# Altium PCB bela_cape.PcbDoc
Units mil, origin at the board's own origin, x right, y up, seen from the top; angles counter-clockwise.
Board outline 3030.03 x 2155.03 mil, 16 copper layers (Top, Route2, Route3, Route4, Route5, Route6, Route7, Route8, Route9, Route10, Route11, Route12, Route13, Route14, Route15, Bottom), stack 34.956 mil thick; 32 components, 22 nets, 194 pads, 21 vias.
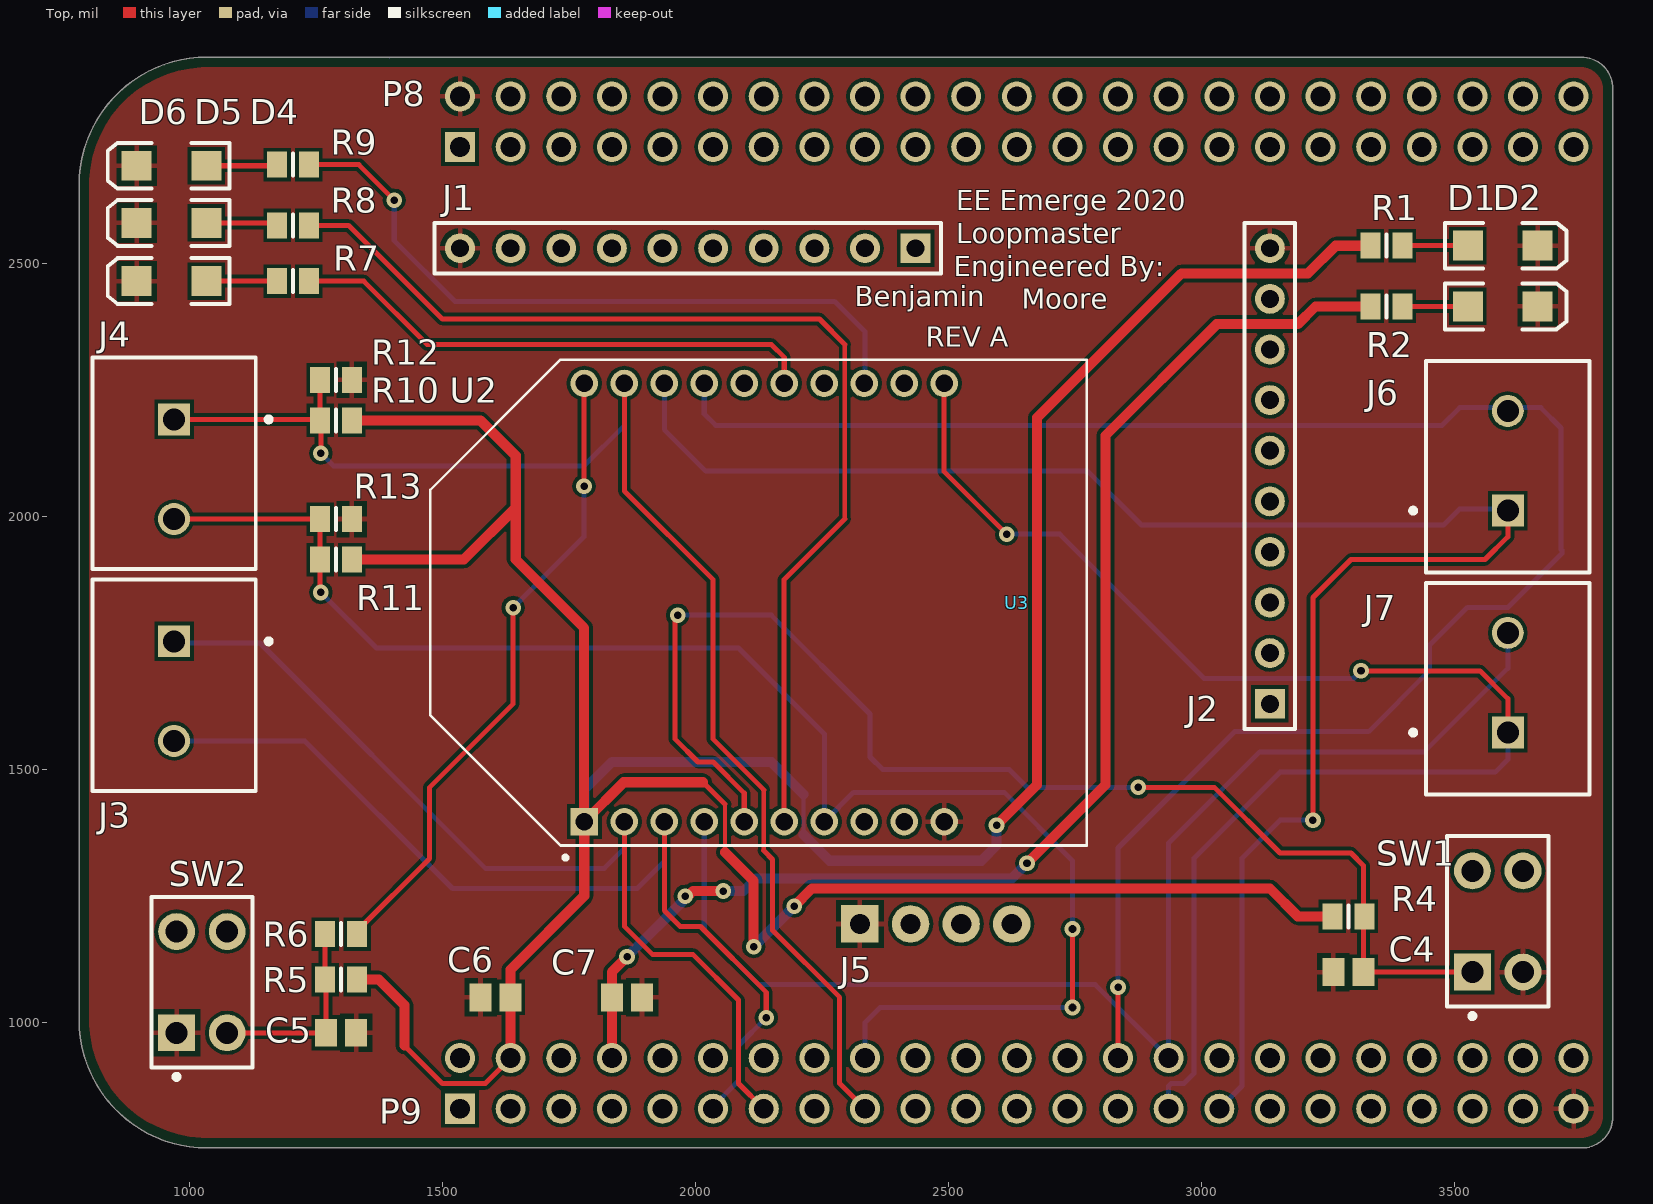
[diagram p0: Top view]
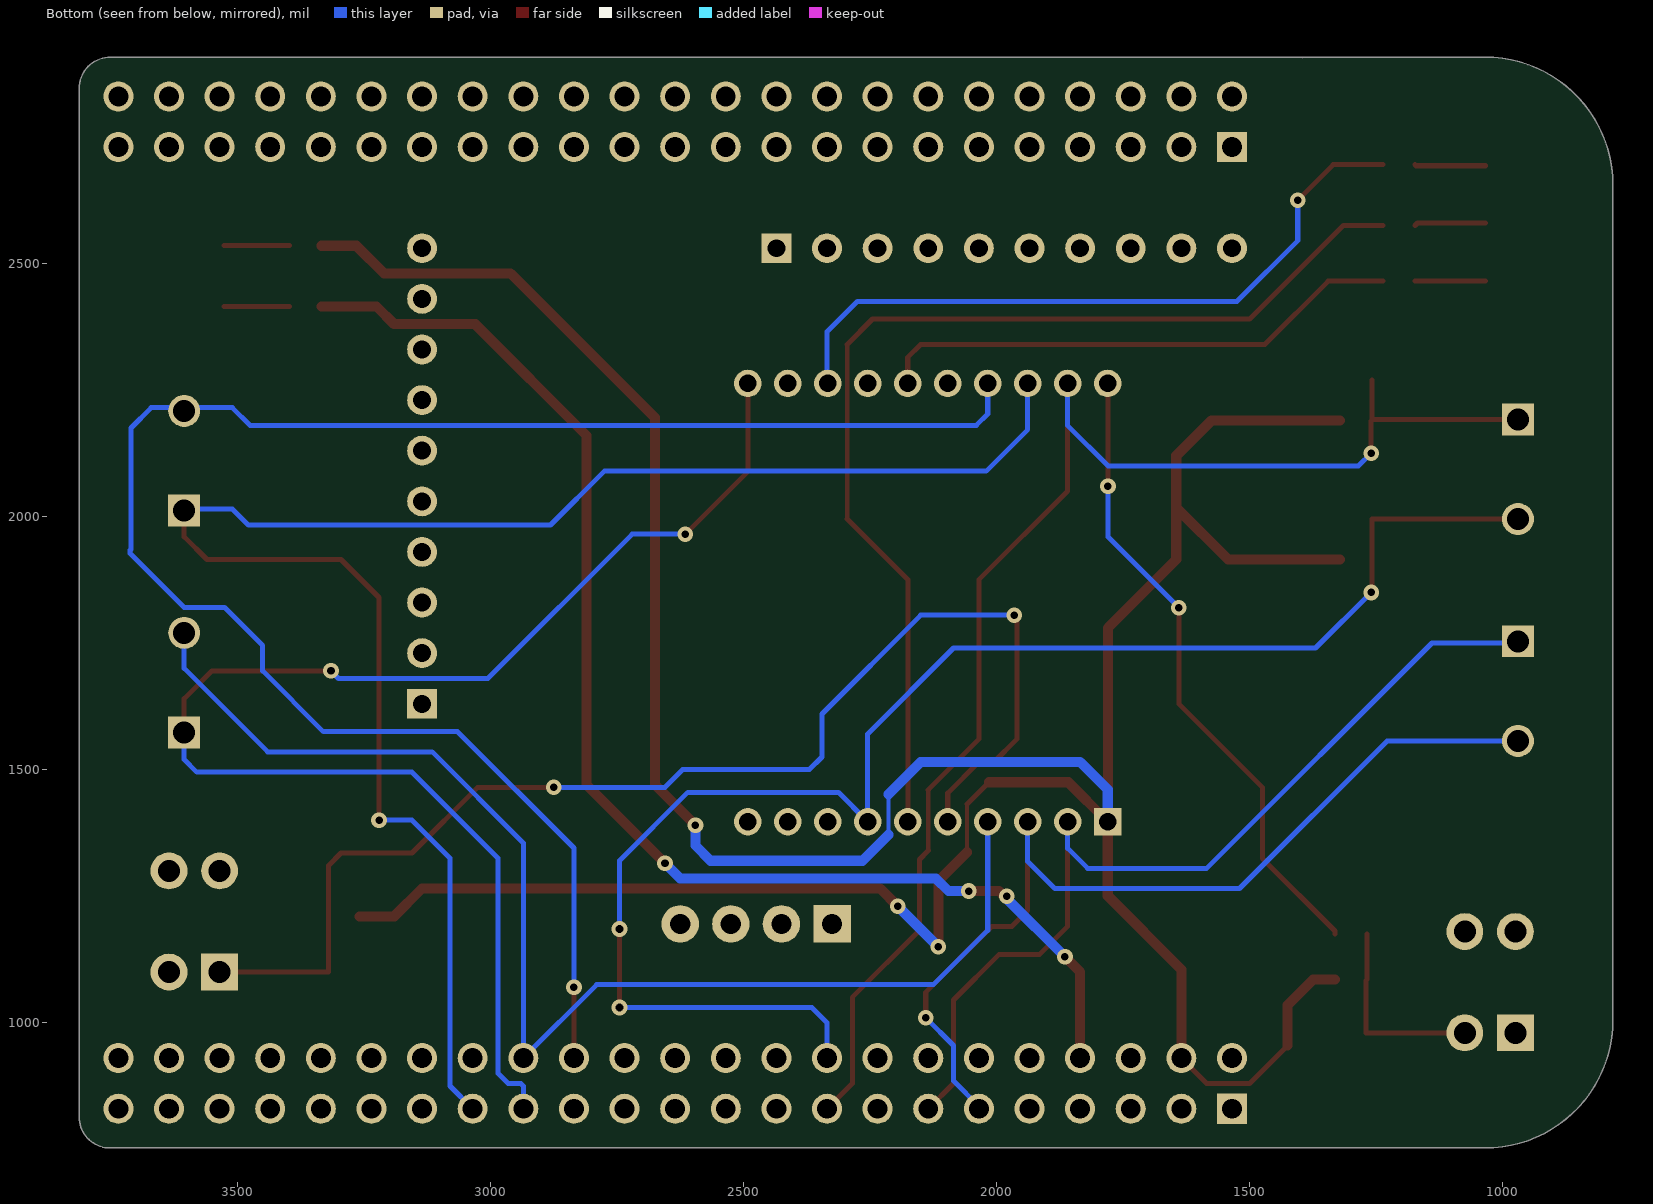
[diagram p1: Bottom view, seen from below]

## Layer stack, top to bottom
Top Solder: solder mask 0.4, Solder Resist, Dk 3.5
Top: signal copper 1.378
Dielectric 1: dielectric 12.6, FR-4, Dk 4.8
Route2: signal copper 1.4
Route3: signal copper 1.4
Route4: signal copper 1.4
Route5: signal copper 1.4
Route6: signal copper 1.4
Route7: signal copper 1.4
Route8: signal copper 1.4
Route9: signal copper 1.4
Route10: signal copper 1.4
Route11: signal copper 1.4
Route12: signal copper 1.4
Route13: signal copper 1.4
Route14: signal copper 1.4
Route15: signal copper 1.4
Bottom: signal copper 1.378
Bottom Solder: solder mask 0.4, Solder Resist, Dk 3.5

## Board outline
782.49,1005 782.49,2655 cw(c1035,2655) 1035,2907.51 3750.51,2907.51 cw(c3750.51,2845.51) 3812.51,2845.51 3812.51,813.9 ccw(c3810,813.9) 3812.51,813.9 ccw(c3810,813.9) 3812.51,813.9 cw(c3751.1,813.9) 3751.1,752.49 cw(c3751.1,755) 3751.1,752.49 cw(c3751.1,755) 3751.1,752.49 1035,752.49 cw(c1035,1005)
cut-out: 1395,2905

## Design rules (kind name [scope] priority, off if disabled: settings)
BoardOutlineClearance mdCopperDimension [All] p1: gap=10 ignorepadtopadclearanceinfootprint=FALSE except(0: Arc-SplitContinuation Track-SplitContinuation SMDPad-SplitContinuation THPad-SplitContinuation Via-SplitContinuation Fill-SplitContinuation Poly-SplitContinuation Region-SplitContinuation Text-SplitContinuation; 20: Poly-OutlineEdge Poly-CavityEdge Poly-CutoutEdge Poly-SplitBarrior)
Clearance Clearance_for_PolygonClass_Isolate_8 [InPolygonClass('Isolate_8')] p1: gap=0 ignorepadtopadclearanceinfootprint=FALSE except(8: Arc-Poly Track-Poly SMDPad-Poly THPad-Poly Via-Poly Fill-Poly Poly-Poly Poly-Region Poly-Text; 20: Poly-Hole)
Clearance Clearance_for_PolygonClass_Isolate_10 [InPolygonClass('Isolate_10')] p2: gap=0 ignorepadtopadclearanceinfootprint=FALSE except(10: Arc-Poly Track-Poly SMDPad-Poly THPad-Poly Via-Poly Fill-Poly Poly-Poly Poly-Region Poly-Text; 20: Poly-Hole)
Clearance "Clearance (Same Net)" [All] p3: gap=7 ignorepadtopadclearanceinfootprint=FALSE except(0: SMDPad-SMDPad SMDPad-THPad SMDPad-Via)
Clearance [All] p4: gap=7 ignorepadtopadclearanceinfootprint=FALSE
HoleSize [All] p1: absolutevalues=TRUE maxlimit=100000 minlimit=15 maxpercent=80.000 minpercent=20.000
HoleToHoleClearance mdDrill [All] p1: gap=8 allowstackedmicrovias=TRUE
PasteMaskExpansion Expansion_SMDPaste_OFF [InPadClass('SMDPaste_OFF')] p1: expansion=0
PasteMaskExpansion mlMinCreamFrame [All] p2: expansion=0
PolygonConnect PolygonConnect_For_PolygonThermal_ON_Width100000_Gap100000 [InPolygonClass('PolygonThermal_ON_Width100000_Gap100000') vs Not IsVia] p1: connectstyle=Relief reliefconductorwidth=10 reliefentries=4 polygonreliefangle="90 Angle" airgapwidth=10
PolygonConnect PolygonConnect_For_PolygonThermal_ON_Width160000_Gap100000 [InPolygonClass('PolygonThermal_ON_Width160000_Gap100000') vs Not IsVia] p2: connectstyle=Relief reliefconductorwidth=16 reliefentries=4 polygonreliefangle="90 Angle" airgapwidth=10
PolygonConnect ThermalVias [IsVia] p3: connectstyle=Direct reliefconductorwidth=10 reliefentries=4 polygonreliefangle="90 Angle" airgapwidth=10
PolygonConnect [All] p4: connectstyle=Relief reliefconductorwidth=10 reliefentries=4 polygonreliefangle="90 Angle" airgapwidth=10
RoomDefinition bela_expansion_card_3 [InComponentClass('bela_expansion_card_3')] p1 off: confinementstyle=ConfineIn formatcopy=TRUE lockcomponents=FALSE outline 4265,1455 5250,1455 5250,1940 4265,1940
RoomDefinition bela_expansion_card_2 [InComponentClass('bela_expansion_card_2')] p2 off: confinementstyle=ConfineIn formatcopy=TRUE lockcomponents=FALSE outline 4260,930 4705,930 4705,1410 4260,1410
RoomDefinition bela_expansion_card_1 [InComponentClass('bela_expansion_card_1')] p3 off: confinementstyle=ConfineIn formatcopy=TRUE lockcomponents=FALSE outline 4260,730 4375,730 4375,880 4260,880
RoutingVias [All] p1: holewidth=15 width=31 viastyle="Through Hole" minholewidth=15 minwidth=31 maxholewidth=100 maxwidth=100
SolderMaskExpansion mlMinStopFrame [All] p1: expansion=4
Width [All] p1: maxlimit=10000 minlimit=8 preferedwidth=8
27 further rules are at their usual default settings.

## Classes and differential pairs
component class bela_expansion_card_3: C5 C6 C7 D4 D5 D6 R5 R6 R7 R8 R9 SW1 SW2 U2 U3
component class bela_expansion_card_2: J1 J2 J3 J4 J5 J6 J7 R10 R11 R12 R13
component class bela_expansion_card_1: D1 D2 R1 R2
polygon class PolygonThermal_ON_Width100000_Gap100000: Polygon_1_Net_AGND
polygon class PolygonThermal_ON_Width160000_Gap100000: Polygon_1_Net_DGND
polygon class Isolate_8: Polygon_1_Net_AGND
polygon class Isolate_10: Polygon_1_Net_DGND

## Components (designator, comment, footprint, x,y, rotation, side; value= is the part's Value field where it differs from the comment)
C4 "Cap2" C0805 3290,1100 r180 top value=1000pF
C5 "Cap2" C0805 1300,980 r0 top value=0.1uF
C6 "Cap Pol3" C0805 1605,1050 r180 top value=.1uF
C7 "Cap Pol3" C0805 1865,1050 r0 top value=.1uF
D1 "LED2" 3.2X1.6X1.1 3595,2535 r0 top
D2 "LED2" 3.2X1.6X1.1 3595,2415 r0 top
D4 "LED2" 3.2X1.6X1.1 965,2465 r180 top
D5 "LED2" 3.2X1.6X1.1 965,2580 r180 top
D6 "LED2" 3.2X1.6X1.1 965,2692.87 r180 top
J1 "PINHD-1X10" HDR1X10 2435,2530 r180 top
J2 "PINHD-1X10" HDR1X10 3135,1630 r90 top
J3 "282836-2" TECO-282836-2_V 970,1655 r270 top
J4 "282836-2" TECO-282836-2_V 970,2093.42 r270 top
J5 "M04PTH" 1X04 2325,1195 r0 top
J6 "282836-2" TECO-282836-2_V 3605,2110 r90 top
J7 "282836-2" TECO-282836-2_V 3605,1671.57 r90 top
R1 "Res3" 6-0805_L 3365,2535 r180 top value=390
R2 "Res3" 6-0805_L 3365,2415 r180 top value=390
R4 "Res3" 6-0805_L 3290,1210 r180 top value=47K
R5 "Res3" 6-0805_L 1300,1085 r0 top value=1K
R6 "Res3" 6-0805_L 1300,1175 r0 top value=1K
R7 "Res3" 6-0805_L 1205,2465 r0 top value=1K
R8 "Res3" 6-0805_L 1205,2575 r0 top value=1K
R9 "Res3" 6-0805_L 1205,2695 r0 top value=1K
R10 "Res3" 6-0805_L 1290,2190 r0 top value=4.7K
R11 "Res3" 6-0805_L 1290,1915 r0 top value=4.7K
R12 "Res3" 6-0805_L 1290,2270 r180 top value=0
R13 "Res3" 6-0805_L 1290,1995 r180 top value=0
SW1 "2-1825027-0" DPST-4 3585,1200 r90 top
SW2 "2-1825027-0" DPST-4 1025,1080 r90 top
U2 "XBP24CAUIT-001" *MODULE_XBP24CAUIT-001 2125,1830 r90 top
U3 "BEAGLEBONE_OUTLINE" BEAGLEBONE_SHIELD 785,2905 r270 top locked

## Footprints (in the part's own frame and the unit in brackets; to place one, negate y for a bottom-side part, rotate by r counter-clockwise, add the part's x,y. Pads: shape width x height; smd on the part's side, far side on the other; paste and mask are expansions set on the pad)
1X04 [mil] "1X04"
  rect 74x74 / inner rect 60x60 / far side rect 74x74 hole 40: 1(0,0)
  round 74 / inner round 60 / far side round 74 hole 40: 2(100,0) 3(200,0) 4(300,0)
3.2X1.6X1.1 [mm] "SMT LED; 2 Flat Leads"
  rect 1.5x1.5 smd: 1(-1.75,0) 2(1.75,0)
  silkscreen extent -2.9,-1.15 3.2,1.15
6-0805_L [mm] "Chip Resistor, Body 2.0x1.2mm, IPC High Density"
  rect 1x1.3 smd: 1(-0.8,0) 2(0.8,0)
  silkscreen extent 0,-0.55 0,0.55, body extent -1.07,-0.7 1.07,0.7, height 0.7
*MODULE_XBP24CAUIT-001 [mil]
  rect 54.25x54.25 hole 34.25: 1(-433,344.5)
  round 54.25 hole 34.25: 2(-433,265.5) 3(-433,186.5) 4(-433,107.5) 5(-433,28.5) 6(-433,-50.5) 7(-433,-129.5) 8(-433,-208.5) 9(-433,-287.5) 10(-433,-366.5) 11(433,-366.5) 12(433,-287.5) 13(433,-208.5) 14(433,-129.5) 15(433,-50.5) 16(433,28.5) 17(433,107.5) 18(433,186.5) 19(433,265.5) 20(433,344.5)
  silkscreen extent -508,-648 480,648
BEAGLEBONE_SHIELD [mm] "BEAGLEBONE_SHIELD"
  rect 1.508x1.508 / inner rect 1.524x1.524 / far side rect 1.508x1.508 hole 1: 1(4.445,19.05) 47(52.705,19.05)
  round 1.508 / inner round 1.524 / far side round 1.508 hole 1: 2(1.905,19.05) 3(4.445,21.59) 4(1.905,21.59) 5(4.445,24.13) 6(1.905,24.13) 7(4.445,26.67) 8(1.905,26.67) 9(4.445,29.21) 10(1.905,29.21) 11(4.445,31.75) 12(1.905,31.75) 13(4.445,34.29) 14(1.905,34.29) 15(4.445,36.83) 16(1.905,36.83) 17(4.445,39.37) 18(1.905,39.37) 19(4.445,41.91) 20(1.905,41.91) 21(4.445,44.45) 22(1.905,44.45) 23(4.445,46.99) 24(1.905,46.99) 25(4.445,49.53) 26(1.905,49.53) 27(4.445,52.07) 28(1.905,52.07) 29(4.445,54.61) 30(1.905,54.61) 31(4.445,57.15) 32(1.905,57.15) 33(4.445,59.69) 34(1.905,59.69) 35(4.445,62.23) 36(1.905,62.23) 37(4.445,64.77) 38(1.905,64.77) 39(4.445,67.31) 40(1.905,67.31) 41(4.445,69.85) 42(1.905,69.85) 43(4.445,72.39) 44(1.905,72.39) 45(4.445,74.93) 46(1.905,74.93) 48(50.165,19.05) 49(52.705,21.59) 50(50.165,21.59) 51(52.705,24.13) 52(50.165,24.13) 53(52.705,26.67) 54(50.165,26.67) 55(52.705,29.21) 56(50.165,29.21) 57(52.705,31.75) 58(50.165,31.75) 59(52.705,34.29) 60(50.165,34.29) 61(52.705,36.83) 62(50.165,36.83) 63(52.705,39.37) 64(50.165,39.37) 65(52.705,41.91) 66(50.165,41.91) 67(52.705,44.45) 68(50.165,44.45) 69(52.705,46.99) 70(50.165,46.99) 71(52.705,49.53) 72(50.165,49.53) 73(52.705,52.07) 74(50.165,52.07) 75(52.705,54.61) 76(50.165,54.61) 77(52.705,57.15) 78(50.165,57.15) 79(52.705,59.69) 80(50.165,59.69) 81(52.705,62.23) 82(50.165,62.23) 83(52.705,64.77) 84(50.165,64.77) 85(52.705,67.31) 86(50.165,67.31) 87(52.705,69.85) 88(50.165,69.85) 89(52.705,72.39) 90(50.165,72.39) 91(52.705,74.93) 92(50.165,74.93)
C0805 [mm] "Chip Capacitor, Body 2.0x1.3mm, IPC High Density"
  rect 1.1x1.4 smd: 1(-0.75,0) 2(0.75,0)
  body extent -1.1,-0.72 1.1,0.72, height 1.4
DPST-4 [mm] "Switch; 4 Leads"
  rect 1.85x1.85 hole 1.1: 1(-2.54,1.27)
  round 1.85 hole 1.1: 2(-2.54,-1.27) 3(2.54,-1.27) 4(2.54,1.27)
  silkscreen extent -4.88,-2.54 4.28,2.54
HDR1X10 [mm] "Connector; Header; 10 Position"
  rect 1.5x1.5 hole 0.9: 1(0,0)
  round 1.5 hole 0.9: 2(2.54,0) 3(5.08,0) 4(7.62,0) 5(10.16,0) 6(12.7,0) 7(15.24,0) 8(17.78,0) 9(20.32,0) 10(22.86,0)
  silkscreen extent -1.27,-1.27 24.13,1.27
TECO-282836-2_V [mm] "Female Header, Pitch 5mm, 1 x 2 Position, Height 10mm"
  rect 1.6x1.6 hole 1.1: 1(-2.5,0)
  round 1.6 hole 1.1: 2(2.5,0)
  silkscreen extent -5.6,-4.1 5,4.88, body extent -5.6,-4.1 5,4.1, height 10

## Part data
C4: library part Cap2_4, "Capacitor", PackageDescription="Capacitor; 2 Leads", PackageReference=CAPR5-4X5, Published=23-Sep-2002, Publisher="Altium Limited"
C5: library part Cap2_1, "Capacitor", PackageDescription="Capacitor; 2 Leads", PackageReference=CAPR5-4X5, Published=23-Sep-2002, Publisher="Altium Limited"
C6 C7: "Polarized Capacitor (Surface Mount)", LatestRevisionDate=29-May-2009, LatestRevisionNote="IPC-7351 Footprint Added.", PackageDescription="Chip Capacitor", PackageReference=C0805, Published=8-Jun-2000, Publisher="Altium Limited"
D1 D2 D4 D5 D6: "Typical RED, GREEN, YELLOW, AMBER GaAs LED", LatestRevisionDate=17-Jul-2002, LatestRevisionNote="Re-released for DXP Platform.", PackageDescription="SM LED; 2 Flat Leads", PackageReference=3.2X1.6X1.1, PackageVersion=Feb-2002, Published=8-Jun-2000, Publisher="Altium Limited"
J1 J2: "PIN HEADER", DeviceSetName=PINHD-1X10, GateName_1=A, LibraryName=pinhead, SymbolName_1=PINHD10
J3 J4 J6 J7: library part CMP-1684-00017-1, "Female Header, Pitch 5 mm, 1 x 2 Position, Height 10 mm, Tail Length 3.5 mm, Rohs, Bulk", Color=Green, Current=13.5A, Manufacturer="TE Connectivity", Package Description="Female Header, Pitch 5 mm, 1 x 2 Position, Height 10 mm, Tail Length 3.5 mm", Package Reference=THD, Standard Package=300, Voltage=300V, 3D Model=282836-2.pdf, Category=Connectors,Interconnects, Clamp Material - Plating=Brass-NickelPlated, Contact Material - Plating=Brass-TinPlated, Datasheet URL=http://www.te.com.cn/commerce/DocumentDelivery/DDEController?Action=showdoc&DocId=Catalog+Section%7F1308389_EUROSTYLE_TERMINAL_BLOCKS%7F0607%7Fpdf%7FEnglish%7FENG_CS_1308389_EUROSTYLE_TERMINAL_BLOCKS_0607.pdf%7F282836-2, Dynamic Catalog=BuchananSeries, Family=TerminalBlocks-WiretoBoard, Featured Product=EurostyleTerminalBlockConnectors, Features=Interlocking(Side), Housing Material=Polyamide(PA66),Nylon6/6, Manufacturer URL=http://www.te.com, Mating Orientation=HorizontalwithBoard, Mounting Type=ThroughHole, Number of Levels=1, Other Names="5ULV-02B / A98076", Packaging=Bulk, Pitch="0.197\"(5.00mm)", Positions Per Level=2, Product Training Modules=Wire-to-BoardEurostyleTerminalBlocks, RoHS Information=282836-2StatementofCompliance, Screw Material - Plating=Brass-NickelPlated, Screw Thread=M3, Series=Buchanan, Torque - Screw=0.68Nm(6Lb-In), Wire Gauge=16-30AWG, Wire Termination=Screw-RisingCageClamp
J5: "Header 4Standard 4-pin 0.1\" header. Use with straight break away headers (SKU : PRT-00116), right angle break away headers (PRT-00553), swiss pins (PRT-00743), machine pins (PRT-00117), and female headers (PRT-00115). Molex polarized connector foot print use with SKU : PRT-08231 with associated crimp pins and housings. 1MM SMD Version SKU: PRT-10208", DeviceName=PTH, DeviceSetName=M04, GateName_1=G$1, LibraryName=SparkFun-Connectors, MANEX=258-0002845, SymbolName_1=M04
R1 R2 R4 R5 R6 R7 R8 R9 R10 R11 R12 R13: "Resistor", LatestRevisionDate=29-May-2009, LatestRevisionNote="IPC-7351 Footprint Added.", PackageDescription="Chip Resistor", PackageReference=J1-0603, Published=8-Jun-2000, Publisher="Altium Limited"
SW1 SW2: library part CMP-2000-05529-1, "Micro-Miniature Pushbutton Switch, 50 mA, -35 to 85 degC, 2-Pin THD, RoHS, Bulk", Actuator Color=Black, Current Rating (Max)=0.05A, Manufacturer="TE Connectivity", Operating Force=1.57N, Operating Temp Range=-35Cto85C, Package Description="2-Pin Through Hole Device, Body 15.86 x 7.11 mm, Pitch 4.5 mm", Voltage Rating (VDC)=24V, Actuator Style=RoundButton, Body Orientation=RightAngle, Contact Material=CopperAlloy, Contact Plating=Silver, Datasheet URL=http://www.te.com/commerce/DocumentDelivery/DDEController?Action=showdoc&DocId=Customer+Drawing%7F1825027%7FG4%7Fpdf%7FEnglish%7FENG_CD_1825027_G4.pdf%7F2-1825027-0, Datasheet Version="Rev. G4, 06/2011", Ground Terminal=No, Illumination Type=NotRequired, Manufacturer 1="TE Connectivity", Manufacturer Part Number 1=2-1825027-0, Manufacturer URL=http://www.te.com/, Mounting Style=ThroughHole, Mounting Technology=ThroughHole, Package Reference=2-1825027-0, Packaging=TapeandReel, Pole Throw Configuration=SPST, Product Depth (mm)=10mm, Product Height (mm)=7.01mm, Product Length (mm)=7.11mm, Switch Function Configuration=OFFON, Terminal Type=PCPins, Type=Micro-Miniature
U2: "802.15.4 Transceiver Module 2.4GHz Antenna Not Included, U.FL Through Hole", Package="Module Digi International", Availability=Unavailable, MF="Digi International", MP=XBP24CAUIT-001, Price=None, SnapEDA_Link=https://www.snapeda.com/parts/XBP24CAUIT-001/Digi%20International/view-part/1219456/?ref=snap
U3: "Should match A3 pinout - but not completely tested", DeviceSetName=BEAGLEBONE_OUTLINE, GateName_1=G$1, LibraryName=adafruit, P1=P1, P2=P2, SymbolName_1=BEAGLEBONE-1

## Via types
v1: diameter 31, hole 15, Top to Bottom, 21 vias

## Nets (pads, with @x,y where several pads share a name; then routed paths per layer and width w, separated by ;. In a path a pad name is that pad's centre, name@x,y a point inside that pad or via, vN(x,y) a via of type N, cw(c..) or ccw(c..) an arc to the next point about the centre after c; other vN are vias at no path point)
+3V3: C6.1 R1.2 R4.2 R5.2 R10.2 R11.2 U2.1 U3.50 | length 7044.7
  Top w8: 2058.37,1336.63 2058.37,1431.63
  Top w10: 1425,955 1500,880 1585,880 U3.50 ; 2015,1475 2058.37,1431.63
  Top w20: R11.2 1542.5,1915 1645,2017.5 ; R10.2 1575,2190 1645,2120 1645,2017.5 ; R5.2 1375,1085 1425,1035 1425,955 ; U3.50 1635,1049.53 C6.1 1634.53,1104.53 1780.5,1250.5 U2.1 ; 2015,1475 1858.5,1475 1782,1398.5 1780,1398.5 1780,1780 1645,1915 1645,2017.5 ; 2058.37,1336.63 2115,1280 v1(2115,1150) ; v1(2195,1230) 2230,1265 2265,1265 3135,1265 3190,1210 R4.2 ; v1(2595,1390) 2675,1470 2675,2195 2960,2480 3210,2480 3265,2535 R1.2
  Bottom w8: 2213.63,1371.37 2213.63,1451.37
  Bottom w20: U2.1 1780.5,1460.5 1835,1515 2150,1515 2213.63,1451.37 ; v1(2115,1150) v1(2195,1230) ; 2213.63,1371.37 2265,1320 2565,1320 2595,1350 v1(2595,1390)
+5V: C7.1 R2.2 U3.54 | length 2620.3
  Top w20: U3.54 1835,1100 v1(1865,1130) ; v1(1980,1250) 1985,1250 1995,1260 v1(2055,1260) ; v1(2655,1315) 2810,1470 2810,2160 3030,2380 3190,2380 3225,2415 R2.2
  Bottom w20: v1(1865,1130) 1980,1245 v1(1980,1250) ; v1(2055,1260) 2095,1260 2120,1285 2625,1285 v1(2655,1315)
GND: C4.2 C5.2 C6.2 C7.2 D1.2 D2.2 D4.2 D5.2 D6.2 J1.10 J2.10 J5.1 R12.1 R13.1 SW1.2 SW2.1 U2.10 U3.2 U3.91
I2C_SDA: J4.2 R11.1 R13.2 U2.7 U3.64 | length 3070.5
  Top w10: J4.2 R13.2 R11.1 1258.5,1851.5 v1(1260,1850) ; v1(2745,1030) v1(2745,1185)
  Bottom w10: v1(1260,1850) 1370,1740 2085,1740 2255,1570 U2.7@2255,1397.5 ; U2.7 U2.7@2255,1397.5 ; U3.64 2335,1000 2365,1030 v1(2745,1030) ; v1(2745,1185) 2745,1320 2610,1455 2312.5,1455 U2.7@2255,1397.5
I2C_SDL: J4.1 R10.1 R12.2 U2.19 U3.63 | length 2806.1
  Top w8: 2135,1340 2135,1460
  Top w10: J4.1 1256.65,2191.85 R10.1 ; R12.2 R10.1 ; v1(1260,2125) 1260,2188.5 R10.1 ; U2.19 1859.5,2050.5 2035,1875 2035,1560 2135,1460 ; 2135,1340 2152.5,1322.5 2152.5,1182.5 2285,1050 2285,880 U3.63 U3.63@2320,830
  Bottom w10: v1(1260,2125) 1285,2100 1780,2100 1859.5,2179.5 U2.19
NetC5_1: C5.1 R5.1 R6.1 SW2.2 | length 391.3
  Top w10: SW2.2 C5.1 1270.47,1083.03 R5.1 R6.1
NetD1_1: D1.1 R1.1 | length 129.6
  Top w10: R1.1 D1.1
NetD2_1: D2.1 R2.1 | length 129.6
  Top w10: R2.1 D2.1
NetD4_1: D4.1 R7.1 | length 139.6
  Top w10: D4.1 R7.1
NetD5_1: D5.1 R8.1 | length 141.7
  Top w10: D5.1 1168.5,2580 R8.1
NetD6_1: D6.1 R9.1 | length 140.5
  Top w10: D6.1 1171.38,2692.87 R9.1
NetR6_2: R6.2 U2.20 | length 1274
  Top w10: R6.2 1331.5,1180.91 1475,1324.41 1475,1465 1640,1630 v1(1640,1820) ; v1(1780,2060) 1780.25,2060.25 1780.25,2262.75 U2.20
  Bottom w10: v1(1640,1820) 1780,1960 v1(1780,2060)
NetR7_2: R7.2 U2.15 | length 1052.8
  Top w10: R7.2 1345,2465 1470,2340 2150,2340 2175.5,2314.5 U2.15
NetR8_2: R8.2 U2.6 | length 2148.8
  Top w8: 2295,1995 2295,2340
  Top w10: R8.2 1315,2575 1500,2390 2245,2390 2295,2340 ; U2.6 2175,1397.5 2175,1875 2295,1995
NetR9_2: R9.2 U2.13 | length 1386.8
  Top w10: R9.2 1335,2695 v1(1405,2625) ; U2.13 U2.13@2335,2264.5
  Bottom w10: v1(1405,2625) 1405,2545 1525,2425 2275,2425 2335,2365 2335,2264.5 U2.13
RESET: C4.1 R4.1 SW1.1 U2.5 | length 2519.7
  Top w10: v1(1965,1805) 1960,1800 1960,1560 2005,1515 2035,1515 2096.5,1453.5 U2.5 ; v1(2875,1465) 3025,1465 3155,1335 3295,1335 3320,1310 3320,1208.5 3319.53,1208.03 C4.1 SW1.1
  Bottom w10: v1(1965,1805) 2150,1805 2345,1610 2345,1525 2370,1500 2620,1500 2655,1465 v1(2875,1465)
SPI_CLK: J6.1 U2.18 U3.77 | length 3461.6
  Top w10: v1(3220,1400) 3220,1840 3295,1915 3560,1915 3605,1960 J6.1
  Bottom w10: U2.18 1938.5,2171.5 2020.53,2089.47 2775,2089.47 2881.32,1983.15 3478.15,1983.15 3510,2015 3601.57,2015 J6.1 ; U3.77 3079.91,874.91 3079.91,1324.91 3155,1400 v1(3220,1400)
SPI_CS: J6.2 U2.17 U3.74 | length 3609.8
  Top w10: U3.74 v1(2835,1070)
  Bottom w10: U2.17 2017.5,2202.5 2040,2180 3475,2180 3510,2215 3598.43,2215 J6.2 3611.57,2215 3670,2215 3710,2175 3710,1935 3711.69,1933.31 3711.69,1926.69 3605,1820 3525,1820 3450,1745 3450,1695 3330,1575 3065,1575 2835,1345 v1(2835,1070)
SPI_MISO: J7.2 U2.4 U3.76 | length 2566.9
  Bottom w10: U2.4 2017.5,1182.5 2125,1075 2790,1075 U3.76 2935,1355 3115,1535 3440,1535 3605,1700 J7.2 J7.2@3595,1780 ; J7.2@3601.57,1790 3605,1790 J7.2@3601.57,1793.43
SPI_MOSI: J7.1 U2.11 U3.75 | length 2845
  Top w10: U2.11 2490.75,2262.25 2490.75,2089.25 v1(2615,1965) ; v1(3315,1695) 3550,1695 3605,1640 J7.1
  Bottom w10: v1(2615,1965) 2720,1965 3005,1680 3300,1680 v1(3315,1695) ; U3.75 2935,875 2940,880 2965,880 2985,900 2985,1325 3155,1495 3580,1495 3605,1520 J7.1 ; J7.1@3600,1588.15 J7.1@3605,1593.15
UART4_RXD: J3.2 U2.3 U3.57 | length 1907.3
  Top w10: U2.3 1938.5,1221.5 1970,1190 2010,1190 2140,1060 v1(2140,1010)
  Bottom w10: J3.2 1228.43,1556.57 1520,1265 1885,1265 1938.5,1318.5 U2.3 ; U3.57 2035,835 2085,885 2085,955 v1(2140,1010)
UART4_TXD: J3.1 U2.2 U3.59 | length 1872.1
  Top w10: U2.2 1859.5,1190.5 1915,1135 1995,1135 2085,1045 2085,880 U3.59
  Bottom w10: J3.1 973.42,1750 1140,1750 1585,1305 1820,1305 1859.5,1344.5 U2.2
pads on no net: J1.1 J1.2 J1.3 J1.4 J1.5 J1.6 J1.7 J1.8 J1.9 J2.1 J2.2 J2.3 J2.4 J2.5 J2.6 J2.7 J2.8 J2.9 J5.2 J5.3 J5.4 SW1.3 SW1.4 SW2.3 SW2.4 U2.8 U2.9 U2.12 U2.14 U2.16 U3.1 U3.3 U3.4 U3.5 U3.6 U3.7 U3.8 U3.9 U3.10 U3.11 U3.12 U3.13 U3.14 U3.15 U3.16 U3.17 U3.18 U3.19 U3.20 U3.21 U3.22 U3.23 U3.24 U3.25 U3.26 U3.27 U3.28 U3.29 U3.30 U3.31 U3.32 U3.33 U3.34 U3.35 U3.36 U3.37 U3.38 U3.39 U3.40 U3.41 U3.42 U3.43 U3.44 U3.45 U3.46 U3.47 U3.48 U3.49 U3.51 U3.52 U3.53 U3.55 U3.56 U3.58 U3.60 U3.61 U3.62 U3.65 U3.66 U3.67 U3.68 U3.69 U3.70 U3.71 U3.72 U3.73 U3.78 U3.79 U3.80 U3.81 U3.82 U3.83 U3.84 U3.85 U3.86 U3.87 U3.88 U3.89 U3.90 U3.92
copper on no net: | length 90
  Top w10: 2230,830 2235,830 ; 2535,930 2535,955 ; 2635,830 2635,845 ; 2635,930 2635,955 ; 3735,925 3735,930
  Top w16: 1635,830 1650,830

## Polygon pours and split planes (outlines as drawn)
GND on Top "GND_L01_P003" (solid, pour order 3): 782.5,671.58 4215.69,671.58 4215.69,2907.5 782.5,2907.5

## Silkscreen, mask and mechanical layers (free items; w line width, h text height)
Top Overlay:
  text "EE Emerge 2020" at 2515,2605 h40
  text "Loopmaster" at 2515,2540 h40
  text "Engineered By:" at 2510,2475 h40
  text "Benjamin" at 2315,2415 h40
  text "Moore" at 2645,2410 h40
  text "REV A" at 2455,2335 h40

## Text inside footprints (layer, text, board x,y; h text height)
U3: Top Overlay "P9" at 1375,800 h50; Top Overlay "P8" at 1380,2810 h50